# Allegro board PROGRAM_CARD_LCD.brd
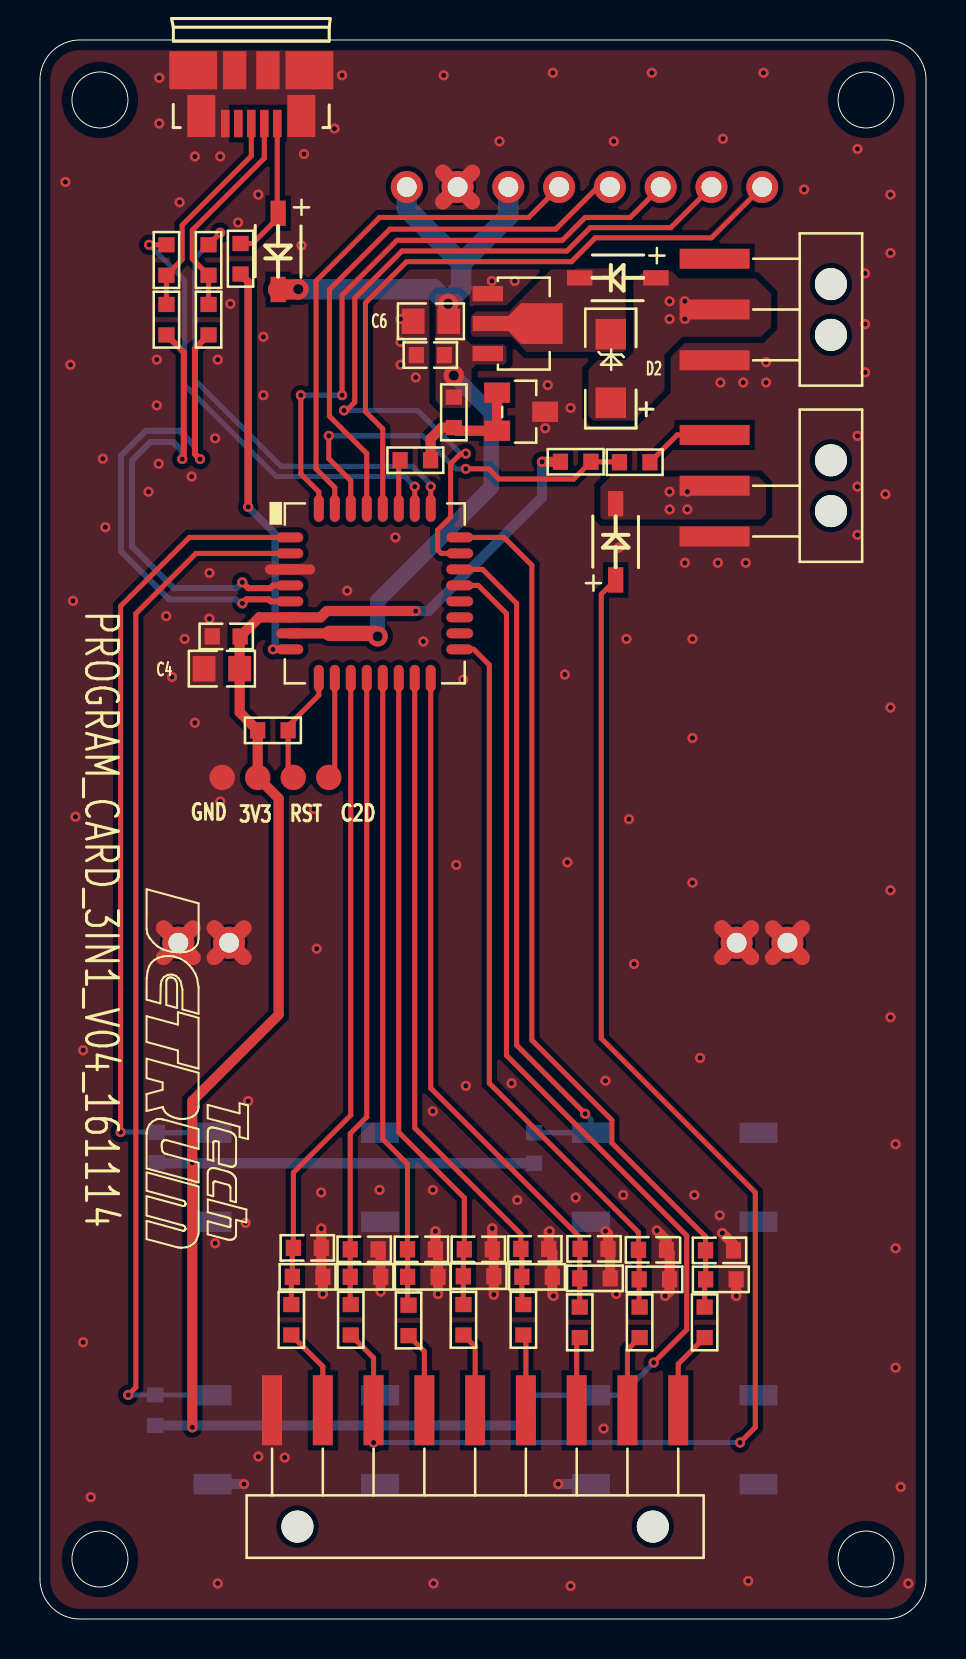
[diagram p0: board, top side]
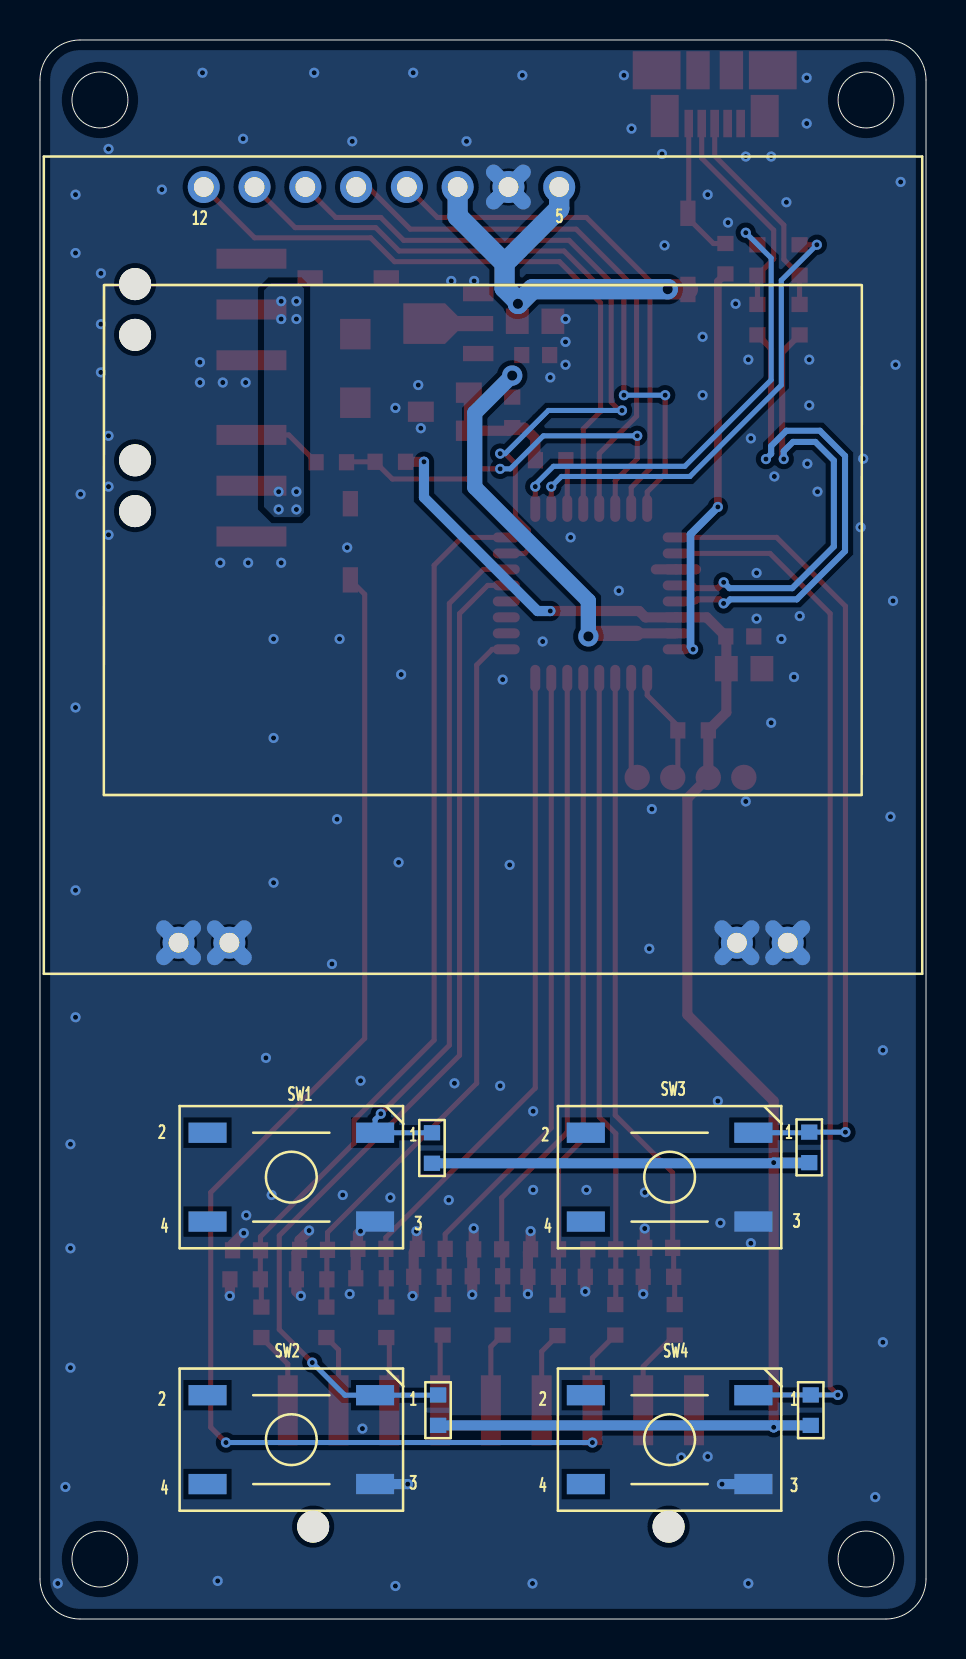
[diagram p1: board, bottom side, seen from below]

Outline 44.32 x 78.98 mm; copper layers: TOP, BOTTOM. Coordinates in mm from the lower left corner of the outline.
Outline path: circle c3,75.98 r1.4 ; circle c3,3 r1.4 ; circle c41.32,75.98 r1.4 ; circle c41.32,3 r1.4 ; 0,76.98 arc(0.59,78.4) 2,78.98 42.32,78.98 arc(43.74,78.4) 44.32,76.98 44.32,2 arc(43.74,0.59) 42.32,0 2,0 arc(0.59,0.59) 0,2 0,76.98

## Design rules (mm)
net group USB_: nets USB_D+ USB_D-

## Placement (name value [footprint] x y rotation side)
C1  104  [C0603]  12.67 18.56 0 top
C2  104  [C0603]  15.52 18.49 0 top
C3  104  [C0603]  10.01 49.15 180 top
C4  106  [C0805]  9.1 47.54 180 top
C5  104  [C0603]  20.23 63.22 180 top
C6  106  [C0805]  19.56 64.91 180 top
C7  104  [C0603]  18.38 18.49 0 top
C8  104  [C0603]  21.23 18.49 0 top
C9  104  [C0603]  24.05 18.51 0 top
C10  104  [C0603]  27.02 18.52 0 top
C11  104  [C0603]  29.94 18.47 0 top
C12  104  [C0603]  33.29 18.44 0 top
D1  SS14  [SOD-123]  28.91 67.08 180 top
D2  LL4148  [D4148]  28.55 62.55 90 top
D3  SS14  [SOD-123]  28.8 53.88 90 top
D4  B340B  [SOD-123]  11.91 68.41 270 top
J1  BAT  [CON3S_2P54]  33.96 65.48 270 top
J2  9P  [CON9S_2P54]  31.93 10.44 180 top
J3  ESC  [CON3S_2P54]  33.96 56.67 270 top
J4  MICRO-USB  [MICROB_MOLEX]  10.57 74.8 180 top
R1  0R  [R0603]  19.54 57.96 180 top
R2  47K  [R0603]  12.57 15.73 270 top
R3  4.7K  [R0603]  12.62 17.12 0 top
R4  47K  [R0603]  15.54 15.73 270 top
R5  4.7K  [R0603]  15.52 17.12 0 top
R6  47K  [R0603]  18.44 15.7 270 top
R7  100  [R0603]  20.7 61.12 270 top
R8  4.7K  [R0603]  18.39 17.12 0 top
R9  1K  [R0603]  10.89 44.45 0 top
R10  47K  [R0603]  21.18 15.73 270 top
R11  4.7K  [R0603]  21.18 17.14 0 top
R12  10K  [R0603]  26.04 57.88 0 top
R13  1K  [R0603]  30.51 57.86 180 top
R14  47K  [R0603]  24.18 15.73 270 top
R15  4.7K  [R0603]  24.1 17.12 0 top
R16  10K  [R0603]  24.71 22.8 90 bottom
R17  10K  [R0603]  24.41 9.68 90 bottom
R18  10K  [R0603]  5.84 22.83 90 bottom
R19  10K  [R0603]  5.77 9.68 90 bottom
R20  47K  [R0603]  27 15.6 270 top
R21  0  [R0603]  10.03 67.28 90 top
R22  4.7K  [R0603]  27 17.04 0 top
R23  47K  [R0603]  30 15.6 270 top
R24  4.7K  [R0603]  29.97 16.99 0 top
R25  47K  [R0603]  33.25 15.6 270 top
R26  4.7K  [R0603]  33.3 16.99 0 top
R27  *  [R0603]  8.43 64.23 90 top
R28  *  [R0603]  6.32 64.23 90 top
R29  0  [R0603]  8.43 68.74 270 top
R30  0  [R0603]  6.32 68.74 270 top
SW1  3MM  [SSW-PUSH]  31.75 22.1 0 bottom
SW2  3MM  [SSW-PUSH]  31.75 8.97 0 bottom
SW3  3MM  [SSW-PUSH]  12.83 22.1 0 bottom
SW4  3MM  [SSW-PUSH]  12.83 8.97 0 bottom
TP1  TP  [TP50]  9.11 42.1 0 top
TP2  TP  [TP50]  10.89 42.1 0 top
TP3  TP  [TP50]  12.67 42.1 0 top
TP4  TP  [TP50]  14.45 42.1 0 top
U1  EFM8UB20F64G-QFP32  [EFM8UB20F64G_QFP32]  12.5 54.1 0 top
U2  JLX12864lcd  [JLX12864G_086PN_12]  8.19 71.63 180 bottom
U3  HT7550  [HT7550_SOT89]  22.4 66.29 270 top
U4  CYT431A  [CYT431A_SOT23]  22.87 61.34 270 top

## Library data of the parts
C1-C12 = C0603-0_1uF-50V
D1 D3 D4 = B340B: User Part Number: *; Tolerance: *
D2 = LL4148
J1 J3 = 1440_201S-1X3
J2 = OQ-3_5-9P-90D
J4 = MICRO-USB_2
R1 R3 R5 R8 R11 R12 R15 R22 R24 R26 = R0603-2k
R2 R4 R6 R10 R14 R20 R23 R25 = R0603-47k
R7 R9 R13 R16-R19 = R0603-10k
R21 R27-R30 = R0603-100k
SW1 = 3MM_1
SW2-SW4 = 3MM
TP1-TP4 = TP
U1 = C8051F381_0
U2 = JLX12864_1
U3 = HT7550_0
U4 = CYT431A

## Footprints (pads in the part's own frame, mm; a bottom-side part is the same pattern mirrored in y, then rotated)
C0603
  rect 0.762x0.813 smd: 1(0,0) 2(1.397,0)
C0805
  rect 1.143x1.27 smd: 1(-0.889,0) 2(0.889,0)
CON3S_2P54
  round 1.6 hole 1.6 unplated: (-1.29,5.61) (1.25,5.61)
  rect 1x3.5 smd: 1(2.52,-0.21) 2(-0.02,-0.21) 3(-2.56,-0.21)
CON9S_2P54
  round 1.6 hole 1.6 unplated: (1.27,5.82) (19.05,5.82)
  rect 1x3.5 smd: 1(20.32,0) 2(17.78,0) 3(15.24,0) 4(12.7,0) 5(10.16,0) 6(7.62,0) 7(5.08,0) 8(2.54,0) 9(0,0)
CYT431A_SOT23
  rect 1.016x1.295 smd: 1(0,0) 2(1.905,0) 3(0.953,2.4)
D4148
  rect 1.524x1.524 smd: 1(-1.714,0) 2(1.714,0)
EFM8UB20F64G_QFP32
  oval 1.35x0.5 smd: 1(0,0) 2(0,-0.8) 3(0,-1.6) 4(0,-2.4) 5(0,-3.2) 6(0,-4) 7(0,-4.8) 8(0,-5.6) 17(8.5,-5.6) 18(8.5,-4.8) 19(8.5,-4) 20(8.5,-3.2) 21(8.5,-2.4) 22(8.5,-1.6) 23(8.5,-0.8) 24(8.5,0)
  oval 0.5x1.35 smd: 9(1.45,-7.05) 10(2.25,-7.05) 11(3.05,-7.05) 12(3.85,-7.05) 13(4.65,-7.05) 14(5.45,-7.05) 15(6.25,-7.05) 16(7.05,-7.05) 25(7.05,1.45) 26(6.25,1.45) 27(5.45,1.45) 28(4.65,1.45) 29(3.85,1.45) 30(3.05,1.45) 31(2.25,1.45) 32(1.45,1.45)
HT7550_SOT89
  rect 0.762x1.524 smd: 1(0,0) 3(2.997,0)
  custom 2.032x4.496 smd: 2(1.499,1.499)
JLX12864G_086PN_12
  round 1.6 hole 0.991: 1(1.27,-37.8) 2(-1.27,-37.8) 3(-26.66,-37.8) 4(-29.2,-37.8) 5(-10.16,0) 6(-12.7,0) 7(-15.24,0) 8(-17.78,0) 9(-20.32,0) 10(-22.86,0) 11(-25.4,0) 12(-27.94,0)
MICROB_MOLEX
  rect 0.432x1.372 smd: 1(-1.3,0) 2(-0.65,0) 3(0,0) 4(0.65,0) 5(1.3,0)
  rect 1.397x2.108 smd: G1(-2.5,-0.376) G2(2.5,-0.376)
  rect 2.388x1.905 smd: G3(-2.905,-2.664) G6(2.905,-2.664)
  rect 1.168x1.905 smd: G4(-0.834,-2.664) G5(0.834,-2.664)
R0603
  rect 0.762x0.813 smd: 1(0,0) 2(1.524,0)
SOD-123
  rect 1.27x0.762 smd: 1(-1.905,0) 2(1.905,0)
SSW-PUSH
  rect 1.905x1.016 smd: 1(-4.191,-2.223) 2(4.191,-2.223) 3(-4.191,2.223) 4(4.191,2.223)
TP50
  round 1.27 smd: 1(0,0)

## Nets
+3V3: C3.1 C4.1 R9.1 R12.1 R16.1 R17.1 R18.1 R19.1 TP2.1 U1.6(VDD)
+5V: C5.1 C6.1 D4.2 R7.1 U1.7(REGIN) U2.5(LDEA) U2.7(VDD) U3.3(OUT)
GND: C1.2 C2.2 C3.2 C4.2 C5.2 C6.2 C7.2 C8.2 C9.2 C10.2 C11.2 C12.2 J1.1 J2.1 J3.1 J4.5 J4.G1(S1) J4.G2(S2) J4.G3(S3) J4.G4(S4) J4.G5(S5) J4.G6(S6) R3.2 R5.2 R8.2 R11.2 R15.2 R22.2 R24.2 R26.2 SW1.3 SW2.3 SW3.3 SW4.3 TP1.1 U1.3(GND) U2.1(NC1) U2.2(NC2) U2.3(NC3) U2.4(NC4) U2.6(VSS) U3.1(GND) U4.3(AODE)
VIN: D1.1 D2.1 D3.2 J1.2 J3.2
AD1: C1.1 R2.1 R3.1 U1.11(P2.7)
AD2: C2.1 R4.1 R5.1 U1.12(P2.6)
AD3: C7.1 R6.1 R8.1 U1.13(P2.5)
AD4: C8.1 R10.1 R11.1 U1.14(P2.4)
AD5: C9.1 R14.1 R15.1 U1.15(P2.3)
AD6: C10.1 R20.1 R22.1 U1.16(P2.2)
AD7: C11.1 R23.1 R24.1 U1.17(P2.1)
AD8: C12.1 R25.1 R26.1 U1.24(P1.2)
C2D: TP4.1 U1.10(P3.0/C2D)
CS: U1.28(P0.6) U2.12(CS)
KEY1: R16.2 SW1.1 U1.22(P1.4)
KEY2: R17.2 SW2.1 U1.21(P1.5)
KEY3: R18.2 SW3.1 U1.1(P0.1)
KEY4: R19.2 SW4.1 U1.2(P0.0)
MCU_RST/C2CK: R9.2 TP3.1 U1.9(\R\S\T/C2CK)
PIN2: J2.2 R2.2
PIN3: D3.1 J2.3 R4.2
PIN4: J2.4 R6.2
PIN5: J2.5 R10.2
PIN6: J2.6 R14.2
PIN7: J2.7 R20.2
PIN8: J2.8 R23.2
PIN9: J2.9 R25.2
RS: U1.32(P0.2) U2.10(RS)
RST: U1.23(P1.3) U2.11(RST)
SCK: U1.31(P0.3) U2.8(SCK)
SDA: U1.29(P0.5) U2.9(SDA)
SIGNAL: R12.2 R13.2 U1.30(P0.4)
UART1_RX: R29.1 U1.25(P1.1)
UART1_TX: R30.1 U1.26(P1.0)
USB_D+: R28.1 U1.4(D+)
USB_D-: R27.1 U1.5(D-)
USB_VBUS: R21.1 U1.8(VBUS)
VREF: R1.1 R7.2 U4.1(REF) U4.2(CATHODE)
N16728828: D4.1 J4.1 R21.2
N16728944: J4.2 R27.2 R29.2
N16736336: D1.2 D2.2 U3.2(IN)
N16737733: J3.3 R13.1
N16745152: R1.2 U1.27(P0.7)
N16784651: J4.3 R28.2 R30.2

Pads without a net: J1 3; J4 4; SW1 2 4; SW2 2 4; SW3 2 4; SW4 2 4; U1 18 19 20

## Via types
v1: diameter 0.508, hole 0.254, TOP to BOTTOM, 169 vias
v2: diameter 1.016, hole 0.508, TOP to BOTTOM, 4 vias

## Routing (per net, layer and track width the routed paths; a pad name or vN(x,y) marks a point on that pad's centre or on a via; arc(x,y) is an arc through that point)
+3V3: length 102.2
  TOP w0.508: v1(7.62,9.59) v1(7.62,22.83) 7.62,25.91 11.94,30.23 11.94,41.05 TP2.1 10.89,42.1 R9.1 9.99,45.35 C4.1 9.99,49.12 C3.1 10.97,50.1 U1.6 14.03,50.1 14.35,50.42 v1(18.8,50.42) ; v1(25.11,57.88) R12.1
  BOTTOM w0.508: v1(25.11,57.88) 25.11,56.1 19.43,50.42 v1(18.8,50.42) ; R19.1 7.53,9.68 v1(7.62,9.59) 7.71,9.68 R17.1 ; v1(7.62,22.83) R18.1 5.87,22.8 R16.1
+5V: length 41.5
  TOP w0.508: 14.48,49.3 U1.7
  TOP w0.762: v2(16.89,49.15) 16.74,49.3 14.48,49.3
  TOP w1.016: D4.2 12.91,66.5 v2(12.92,66.52)
  BOTTOM w0.762: v2(16.89,49.15) 16.89,50.93 22.57,56.61 22.57,60.33 v2(20.7,62.2)
  BOTTOM w1.016: U2.5 18.35,70.55 21.08,67.82 ; v2(12.92,66.52) 19.68,66.52 v2(20.41,65.79) 20.41,65.91 21.08,66.58 21.08,67.82 ; U2.7 23.43,70.17 21.08,67.82
GND: length 70.6
  TOP w0.508: C12.2 34.69,18.75 v1(34.13,19.3) ; R26.2 34.82,16.17 v1(34.83,16.16) ; v1(22.62,19.54) C8.2 22.7,18.41 R11.2 v1(22.7,16.22) ; 13.51,52.5 U1.3 11.51,52.5 ; v1(19.91,16.26) R8.2 19.91,18.36 C7.2 v1(19.78,19.4) ; C2.2 17.04,18.36 R5.2 v1(17.04,16.38) ; R22.2 28.52,18.41 C10.2 28.42,19.27 v1(28.29,19.4) ; v1(14.07,19.53) C1.2 14.07,17.19 R3.2 v1(14.15,16.26) ; v1(31.27,16.16) 31.5,16.38 R24.2 31.5,18.31 C11.2 31.34,18.96 v1(30.86,19.43) ; v1(25.69,16.16) 25.63,16.22 R15.2 25.63,18.34 C9.2 25.45,19.35 v1(25.49,19.4)
  TOP w0.762: U2.1 7.66,34.57 ; U2.1 7.66,33.09 ; U2.1 6.18,34.57 ; U2.1 6.18,33.09 ; U2.3 35.59,33.09 ; U2.3 34.11,34.57 ; U2.3 34.11,33.09 ; U2.3 35.59,34.57 ; U2.2 10.2,34.57 ; U2.2 10.2,33.09 ; U2.2 8.72,33.09 ; U2.2 8.72,34.57 ; U2.4 38.13,34.57 ; U2.4 36.65,34.57 ; U2.4 38.13,33.09 ; U2.4 36.65,33.09 ; U2.6 21.63,72.37 ; U2.6 20.15,72.37 ; U2.6 20.15,70.89 ; U2.6 21.63,70.89
  BOTTOM w0.508: SW4.3 v1(10.21,6.75) ; SW2.3 v1(25.93,6.75)
  BOTTOM w0.762: U2.2 10.2,34.57 ; U2.2 8.72,34.57 ; U2.2 10.2,33.09 ; U2.2 8.72,33.09 ; 36.65,33.09 U2.4 ; U2.4 38.13,33.09 ; U2.4 36.65,34.57 ; U2.4 38.13,34.57 ; U2.1 7.66,34.57 ; U2.1 6.18,34.57 ; U2.1 7.66,33.09 ; U2.1 6.18,33.09 ; 34.11,33.09 U2.3 ; U2.3 34.11,34.57 ; U2.3 35.59,33.09 ; U2.3 35.59,34.57 ; 20.15,70.89 U2.6 ; U2.6 20.15,72.37 ; U2.6 21.63,70.89 ; U2.6 21.63,72.37
  vias: v1(1.27,71.88) v1(1.52,62.74) v1(1.65,50.93) v1(1.78,40.13) v1(2.16,28.45) v1(2.16,13.84) v1(2.54,6.1) v1(3.14,58.04) v1(3.27,54.61) v1(5.43,56.39) v1(5.84,62.99) v1(5.84,60.71) v1(5.94,57.78) v1(5.97,77.09) v1(5.97,74.8) v1(6.32,50.16) v1(6.6,47.12) v1(6.99,70.87) v1(7.24,49.02) v1(7.59,57.15) v1(7.75,73.15) v1(7.75,44.83) v1(8.48,52.32) v1(8.48,50.04) v1(8.76,59.05) v1(8.76,18.8) v1(8.89,62.99) v1(8.89,1.78) v1(9.02,73.15) v1(9.02,40.89) v1(9.53,65.79) v1(9.91,69.85) v1(10.29,19.81) v1(10.41,25.91) v1(10.92,71.25) v1(10.92,8.13) v1(11.18,64.14) v1(11.18,61.21) v1(12.24,8.08) v1(13.08,68.71) v1(13.21,73.28) v1(13.72,40.51) v1(13.84,33.53) v1(14.06,21.34) v1(14.73,74.55) v1(15.11,77.22) v1(15.37,51.44) v1(16.99,21.46) v1(17.78,54.1) v1(18.03,65.02) v1(18.03,63.88) v1(18.03,62.74) v1(18.8,62.1) v1(19.18,48.9) v1(19.65,25.4) v1(19.65,21.46) v1(19.69,1.78) v1(20.19,77.22) v1(20.83,37.72) v1(21.18,46.99) v1(21.3,26.67) v1(22.61,66.93) v1(22.99,73.91) v1(23.59,26.8) v1(23.75,66.93) v1(23.88,20.95) v1(25.27,59.56) v1(25.4,61.72) v1(25.65,77.34) v1(26.26,47.24) v1(26.38,37.85) v1(26.54,60.58) v1(26.54,1.65) v1(26.8,21.08) v1(28.19,9.53) v1(28.29,26.92) v1(28.7,73.91) v1(28.83,16.26) v1(28.96,53.59) v1(29.18,21.21) v1(29.34,49.02) v1(29.46,40.01) v1(29.72,32.77) v1(30.61,77.34) v1(32.26,52.83) v1(32.64,49.02) v1(32.64,44.07) v1(32.64,36.83) v1(32.73,21.21) v1(33.02,28.07) v1(33.91,52.83) v1(34.04,61.85) v1(34,20.19) v1(34.16,74.04) v1(35.18,61.85) v1(35.31,52.83) v1(35.43,1.91) v1(36.2,77.34) v1(36.32,62.87) v1(36.32,61.85) v1(38.23,71.5) v1(40.89,73.53) v1(40.89,59.18) v1(40.89,56.64) v1(40.89,54.23) v1(41.28,67.31) v1(41.28,64.77) v1(41.28,62.36) v1(42.29,56.26) v1(42.55,71.25) v1(42.55,68.33) v1(42.55,45.59) v1(42.55,36.45) v1(42.55,30.1) v1(42.8,23.75) v1(42.8,18.54) v1(42.8,12.57) v1(43.05,6.6) v1(43.43,1.78)
VIN:
  vias: v1(31.5,65.91) v1(31.5,65.02) v1(31.5,56.39) v1(31.5,55.5) v1(32.26,65.91) v1(32.26,65.02) v1(32.39,56.39) v1(32.39,55.5)
AD1: length 32.6
  TOP w0.254: R2.1 12.57,17.07 R3.1 12.62,18.51 C1.1 12.67,22.33 15.55,25.2 U1.11
AD2: length 31.7
  TOP w0.254: R4.1 15.52,15.75 R5.1 C2.1 15.52,24.28 16.35,25.11 U1.12
AD3: length 31.9
  TOP w0.254: R6.1 18.39,15.75 R8.1 18.39,18.48 C7.1 18.38,22.77 17.15,24 U1.13
AD4: length 32.7
  TOP w0.254: R10.1 21.18,15.74 R11.1 21.18,18.44 C8.1 21.23,21.06 17.95,24.34 U1.14
AD5: length 33.6
  TOP w0.254: U1.15 18.75,24.56 24.05,19.25 C9.1 24.1,18.46 R15.1 24.1,15.81 R14.1
AD6: length 34.6
  TOP w0.254: U1.16 19.55,26.55 27.02,19.08 C10.1 27,18.5 R22.1 R20.1
AD7: length 37
  TOP w0.254: R23.1 29.97,15.63 R24.1 29.97,18.43 C11.1 29.94,19.34 22.48,26.8 22.48,47.72 21.7,48.5 U1.17
AD8: length 44.9
  TOP w0.254: U1.24 23.21,54.1 24.61,52.7 24.61,28.96 28.61,24.96 28.61,23.81 33.29,19.13 C12.1 33.3,18.43 R26.1 33.25,16.94 R25.1
C2D: length 5.1
  TOP w0.254: U1.10 14.75,42.39 TP4.1
CS: length 32.9
  TOP w0.254: U1.28 17.15,59.53 16.28,60.39 16.28,65.84 18.34,67.89 26.59,67.89 27.78,69.09 33.59,69.09 U2.12
KEY1: length 34.4
  TOP w0.254: U1.22 22.14,52.5 23.84,50.8 23.84,28.7 v1(27.27,25.27)
  BOTTOM w0.254: R16.2 24.72,24.32 SW1.1 27.56,24.99 v1(27.27,25.27)
KEY2: length 51.8
  TOP w0.254: U1.21 21.93,51.7 23.34,50.29 23.34,28.19 32.35,19.18 32.35,14.48 v1(30.7,12.83)
  BOTTOM w0.254: R17.2 24.42,11.19 SW2.1 29.07,11.19 v1(30.7,12.83)
KEY3: length 40.8
  TOP w0.254: v1(4.03,24.35) 4.03,50.66 7.47,54.1 U1.1
  BOTTOM w0.254: v1(4.03,24.35) R18.2 5.87,24.32 SW3.1
KEY4: length 52.4
  TOP w0.254: v1(4.41,11.21) 4.79,11.59 4.79,50.29 7.8,53.3 U1.2
  BOTTOM w0.254: v1(4.41,11.21) R19.2 8.62,11.21 SW4.1
MCU_RST/C2CK: length 5.7
  TOP w0.254: TP3.1 12.41,42.35 R9.2 12.41,44.67 13.95,46.2 U1.9
PIN2: length 4.4
  TOP w0.254: J2.2 14.15,12.63 R2.2
PIN3: length 69.5
  TOP w0.254: v1(35.02,8.83) 35.78,9.59 35.78,21.34 28.08,29.04 28.08,51.26 D3.1 ; J2.3 16.69,13.06 R4.2
  BOTTOM w0.254: v1(16.69,8.83) v1(35.02,8.83)
PIN4: length 4.1
  TOP w0.254: J2.4 19.23,13.38 R6.2
PIN5: length 4
  TOP w0.254: J2.5 21.77,13.62 R10.2
PIN6: length 3.8
  TOP w0.254: J2.6 24.31,14.08 R14.2
PIN7: length 3.7
  TOP w0.254: J2.7 26.85,13.93 R20.2
PIN8: length 3.9
  TOP w0.254: R23.2 29.39,13.47 J2.8
PIN9: length 4.2
  TOP w0.254: J2.9 31.93,12.76 R25.2
RS: length 31.3
  TOP w0.254: v1(13.05,61.21) 13.05,57.28 13.95,56.38 U1.32 ; v1(15.11,61.21) 15.11,66.22 17.86,68.96 26.13,68.96 27.27,70.1 29.53,70.1 U2.10
  BOTTOM w0.254: v1(15.11,61.21) v1(13.05,61.21)
RST: length 39.8
  TOP w0.254: v1(15.21,60.45) 15.33,60.45 15.75,60.87 15.75,66.07 18.11,68.43 26.36,68.43 27.53,69.6 31.56,69.6 U2.11 ; U1.23 20.07,53.3 19.89,53.48 19.89,54.47 20.54,55.12 20.54,57.78 21.05,58.29 v1(21.3,58.29)
  BOTTOM w0.254: v1(15.21,60.45) 18.89,60.45 21.05,58.29 v1(21.3,58.29)
SCK: length 25.9
  TOP w0.254: U2.8 24.45,70.1 16.99,70.1 13.81,66.93 13.81,57.53 14.75,56.6 U1.31
SDA: length 27.9
  TOP w0.254: U1.29 16.35,58.3 14.48,60.17 14.48,66.5 17.5,69.52 25.8,69.52 27.91,71.63 U2.9
SIGNAL: length 19.9
  TOP w0.254: v1(21.3,57.53) 22.45,57.53 22.95,57.02 26.7,57.02 R12.2 28.97,57.88 R13.2 ; U1.30 15.55,56.94 14.45,58.04 v1(14.45,59.18)
  BOTTOM w0.254: v1(21.3,57.53) 20.8,57.53 19.14,59.18 v1(14.45,59.18)
UART1_RX: length 23.9
  TOP w0.254: R29.1 9.02,69.32 v1(9.02,69.34) ; U1.25 v1(19.55,56.64)
  BOTTOM w0.254: v1(9.02,69.34) 7.75,68.07 7.75,61.98 12.07,57.66 18.64,57.66 19.55,56.75 v1(19.55,56.64)
UART1_TX: length 23.3
  TOP w0.254: R30.1 v1(5.46,68.74) ; U1.26 v1(18.75,56.64)
  BOTTOM w0.254: v1(5.46,68.74) 7.24,66.96 7.24,61.72 11.81,57.15 18.24,57.15 v1(18.75,56.64)
USB_D+: length 23.4
  TOP w0.305: v1(7.12,58.02) 7.19,58.1 7.19,63.36 R28.1 ; v1(10.12,51.85) 10.41,51.56 11.52,51.56 11.66,51.7 U1.4
  BOTTOM w0.305: v1(10.12,51.85) 9.83,51.56 6.69,51.56 4.61,53.64 4.61,57.95 5.54,58.88 6.65,58.88 7.12,58.41 v1(7.12,58.02)
USB_D-: length 26.3
  TOP w0.305: U1.5 11.54,50.9 11.44,51 10.33,51 v1(10.13,50.8) ; R27.1 7.75,63.55 7.75,58.27 v1(8.01,58.02)
  BOTTOM w0.305: v1(10.13,50.8) 10,50.8 9.8,51 6.46,51 4.05,53.41 4.05,58.18 5.31,59.44 6.99,59.44 7.75,58.67 7.75,58.28 v1(8.01,58.02)
USB_VBUS: length 20.4
  TOP w0.381: R21.1 10.41,66.9 v1(10.41,55.63) ; v1(11.65,48.5) U1.8
  BOTTOM w0.381: v1(11.65,48.5) 11.78,48.63 11.78,54.26 v1(10.41,55.63)
VREF: length 6.6
  TOP w0.508: U4.1 U4.2 20.86,59.44 R7.2 20.1,59.6 19.54,59.04 R1.1
N16728828: length 7.2
  TOP w0.254: J4.1 11.87,70.36 D4.1 11.91,70.08 10.64,68.8 R21.2
N16728944: length 10.9
  TOP w0.254: J4.2 11.22,73.07 7.62,69.47 7.62,68.03 R29.2 R27.2
N16737733: length 3.8
  TOP w0.254: J3.3 31.88,59.23 R13.1
N16745152: length 2.4
  TOP w0.254: R1.2 17.95,57.89 U1.27
N16784651: length 10.8
  TOP w0.254: J4.3 10.57,73.18 7.11,69.72 7.11,68 R30.2 R28.2

## Copper pours and planes (outline as drawn; the poured copper is in the pictures)
+5V on TOP: 21.46,60.58 21.59,60.71 21.59,62.52 21.81,62.74 23.21,62.74 23.34,62.87 23.34,63.63 23.21,63.75 21.56,63.75 21.18,64.14 21.18,66.04 20.92,66.29 19.91,66.29 19.78,66.17 19.78,60.96 20.16,60.58
GND on TOP: 43.82,2 43.38,0.94 42.32,0.51 2,0.51 0.94,0.94 0.51,2 0.51,76.98 0.94,78.04 2,78.47 42.32,78.47 43.38,78.04 43.82,76.98 ; 12 cut-outs
GND on BOTTOM: 43.82,2 43.38,0.94 42.32,0.51 2,0.51 0.94,0.94 0.51,2 0.51,76.98 0.94,78.04 2,78.47 42.32,78.47 43.38,78.04 43.82,76.98
VIN on TOP: 36.07,64.14 32.13,64.14 31.24,63.25 31.24,61.47 29.72,59.94 27.69,59.94 27.43,60.2 27.43,62.48 27.92,62.98 29.29,62.98 29.69,63.37 29.69,66.91 30.19,67.42 31.61,67.42 31.97,67.06 35.81,67.06 36.58,66.29 36.58,64.64
VIN on TOP: 36.32,56.77 36.32,55.28 36.04,54.99 28.16,54.99 28.03,55.12 28.03,56.64 28.54,57.15 35.94,57.15
VIN on BOTTOM: 32.77,66.8 31.37,66.8 31.12,66.55 31.12,55.34 31.34,55.12 32.61,55.12 33.11,55.63 33.11,66.45
N16736336 on TOP: 29.18,63.37 29.3,63.5 29.3,66.93 28.67,67.56 25.62,67.56 23.46,65.41 21.81,65.41 21.56,65.15 21.56,64.26 21.68,64.14 23.59,64.14 24.35,63.37

## Text on the board
Ref Des/Silkscreen Top: GND | 3V3 | RST | C2D | PROGRAM_CARD_3IN1_V04_161114
User.7: 3 | 1 | 5 | 2 | 4 | 12
User.10: 3 | 1 | 5 | 2 | 4 | 12
User.36: FIGURE | SIZE | 10.0 | 20.0 | 39.0 | 62.9882 | DRILL CHART: TOP to BOTTOM | ALL UNITS ARE IN MILS | TOLERANCE | +0.0/-0.0 | +2.0/-2.0 | PLATED | NON-PLATED | QTY | 169 | 4 | 12 | 6
